# Altium PCB USBPowerv1.0.PcbDoc
Units mm, origin at the board's own origin, x right, y up, seen from the top; angles counter-clockwise.
Board outline 26.67 x 61.59 mm, 2 copper layers (Top Layer, Bottom Layer); 29 components, 14 nets, 75 pads, 72 vias.
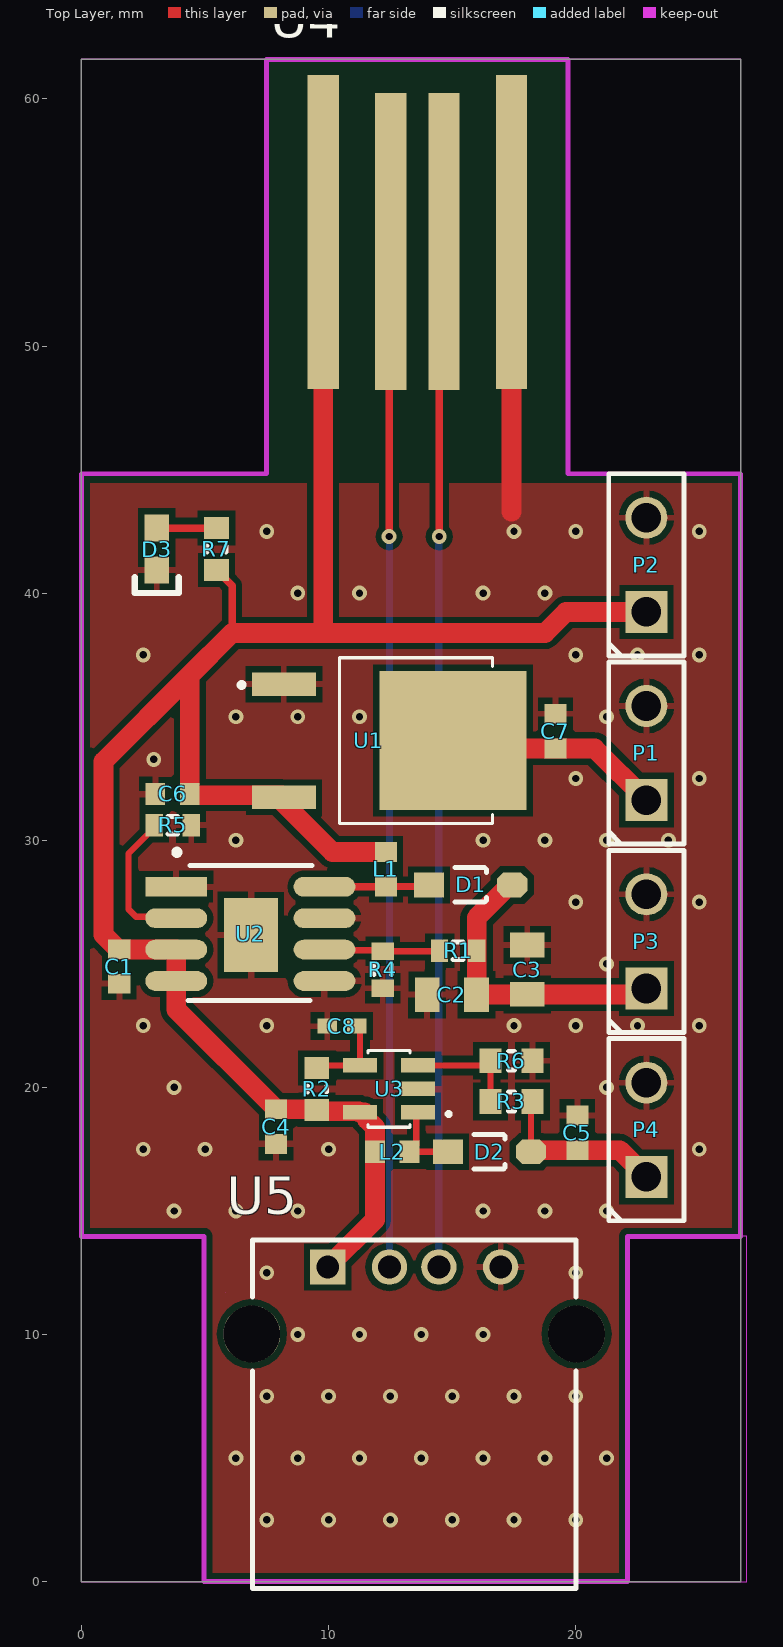
[diagram p0: Top Layer view]
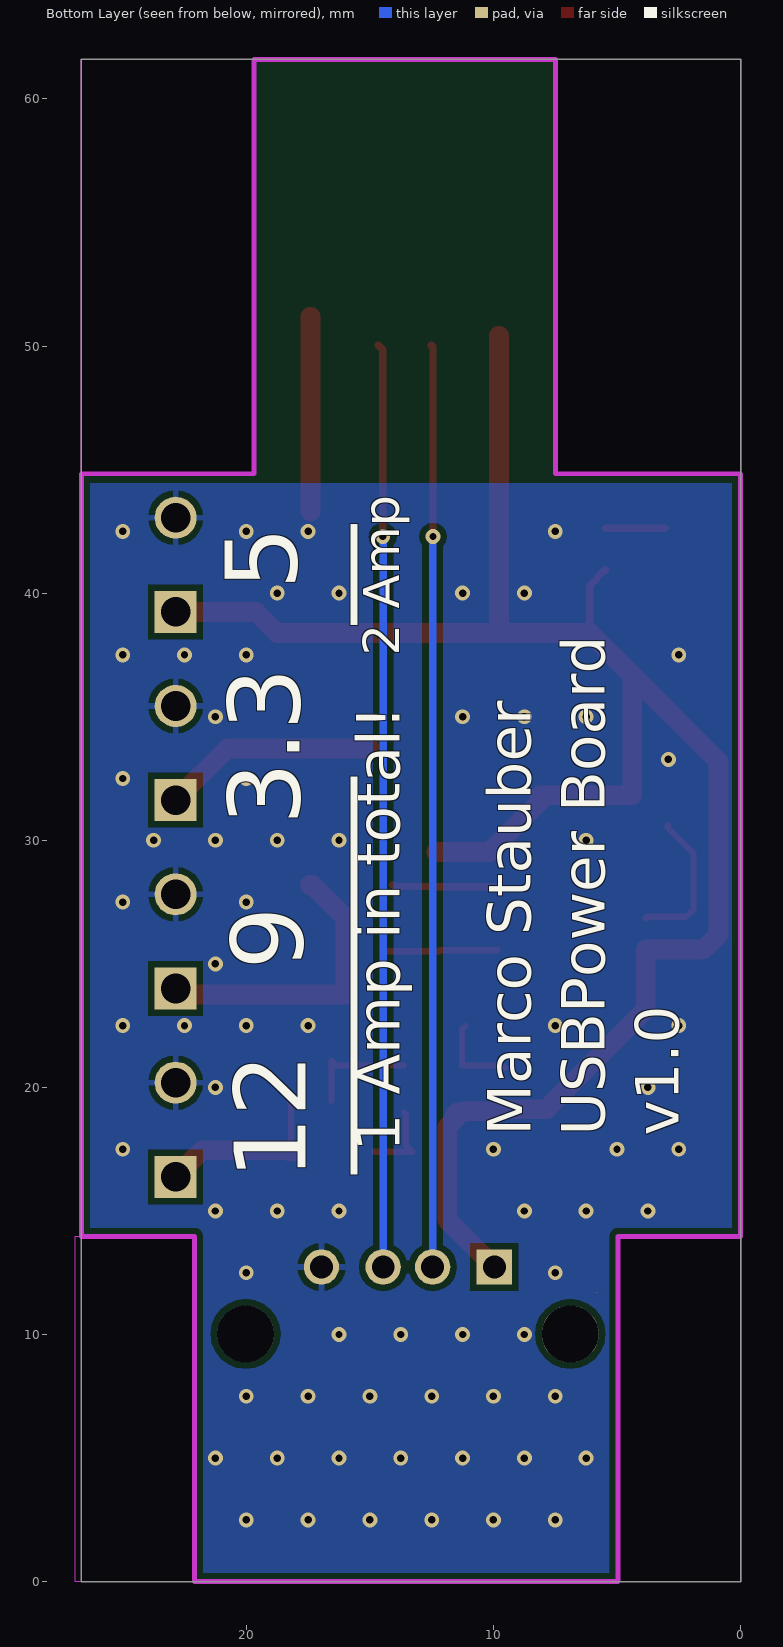
[diagram p1: Bottom Layer view, seen from below]
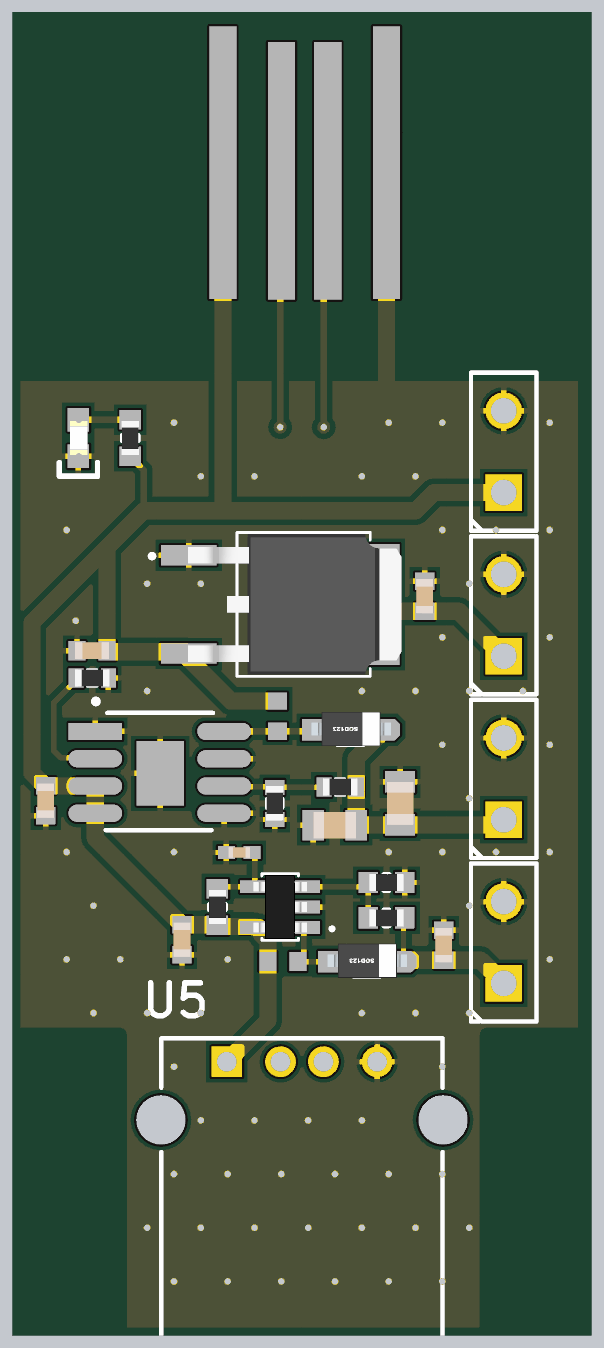
[diagram p2: 3D render of the assembled board from above, using the file's embedded part models]

## Layer stack, top to bottom
Top Solder: solder mask 0.0102, Solder Resist, Dk 3.5
Top Layer: signal copper 0.0356
Dielectric 1: dielectric 0.32, FR-4, Dk 4.8
Bottom Layer: signal copper 0.0356
Bottom Solder: solder mask 0.0102, Solder Resist, Dk 3.5

## Board outline
0,0 26.67,0 26.67,61.595 0,61.595
cut-out: 0,0 4.953,0 4.953,13.97 0,13.97
cut-out: 19.685,44.831 26.67,44.831 26.67,61.595 19.685,61.595
cut-out: 0,44.831 7.493,44.831 7.493,61.595 0,61.595
cut-out: 22.098,0 26.924,0 26.924,13.97 22.098,13.97
cut-out: 5.842,11.684

## Design rules (kind name [scope] priority, off if disabled: settings)
Clearance [All] p1: gap=0.254 ignorepadtopadclearanceinfootprint=FALSE except(0: Arc-Hole Track-Hole SMDPad-Hole THPad-Hole Via-Hole Fill-Hole Poly-Hole Region-Hole Text-Hole)
PolygonConnect [All] p1: thpad.connectstyle=Relief thpad.reliefconductorwidth=0.254 thpad.reliefentries=4 thpad.polygonreliefangle="90 Angle" thpad.airgapwidth=0.254 smdpad.connectstyle=Relief smdpad.reliefconductorwidth=0.254 smdpad.reliefentries=4 smdpad.polygonreliefangle="90 Angle" smdpad.airgapwidth=0.254 via.connectstyle=Direct via.reliefconductorwidth=0.254 via.reliefentries=4 via.polygonreliefangle="90 Angle" via.airgapwidth=0.254
RoomDefinition USBPowerv1.0 [InComponentClass('USBPowerv1.0')] p1 off: confinementstyle=ConfineIn formatcopy=TRUE lockcomponents=FALSE outline 154.37,9.398 299.785,9.398 299.785,24.638 154.37,24.638
RoutingVias [All] p1: holewidth=6 width=8 viastyle="Through Hole" minholewidth=0.3 minwidth=0.6 maxholewidth=0.3 maxwidth=0.6
SolderMaskExpansion [All] p1: expansion=0.102
Width [All] p1: maxlimit=6 minlimit=0.254 preferedwidth=0.254
30 further rules are at their usual default settings.

## Classes and differential pairs
component class USBPowerv1.0: C1 C2 C3 C4 C5 C6 C7 C8 D2 D3 L1 L2 P1 P2 P3 R1 R2 R3 R4 R5 R6 R7 U1 U2 U3 U4 U5

## Components (designator, comment, footprint, x,y, rotation, side; value= is the part's Value field where it differs from the comment)
C1 "10uF" "CAP_0603i_1608m -L" 1.524,24.892 r90 top
C2 "22uF" "CAP_0805i_2012m -N" 14.986,23.749 r0 top
C3 "22uF" "CAP_0805i_2012m -N" 18.034,24.765 r270 top
C4 "10uF" "CAP_0603i_1608m -L" 7.874,18.415 r90 top
C5 "10uF" "CAP_0603i_1608m -L" 20.066,18.161 r270 top
C6 "10uF" "CAP_0603i_1608m -L" 3.683,31.877 r0 top
C7 "10uF" "CAP_0603i_1608m -L" 19.177,34.417 r270 top
C8 "1nF" "CAP_0402i_1005m -N" 10.541,22.479 r0 top
D1 "Diode  Schottky" SOD123 15.748,28.194 r180 top
D2 "Diode  Schottky" SOD123 16.51,17.399 r180 top
D3 "Grün" *0603 3.048,41.783 r90 top
L1 "4.7uH" "IND_0603i_1608m -L" 12.319,28.829 r270 top
L2 "4.7uH" "IND_0603i_1608m -L" 12.573,17.399 r0 top
P1 "Header 2" "3.81mm HDR1X2" 22.86,31.623 r90 top
P2 "Header 2" "3.81mm HDR1X2" 22.86,39.243 r90 top
P3 "Header 2" "3.81mm HDR1X2" 22.86,24.003 r90 top
P4 "Header 2" "3.81mm HDR1X2" 22.86,16.383 r90 top
R1 "180k" "RES_0603_1608m -L" 15.24,25.527 r0 top
R2 "1M" "RES_0603i_1608m -N" 9.525,19.939 r90 top
R3 "470k" "RES_0603i_1608m -N" 17.399,19.431 r180 top
R4 "13k" "RES_0603_1608m -L" 12.192,24.765 r90 top
R5 "160k" "RES_0603_1608m -L" 3.695,30.607 r180 top
R6 "51k" "RES_0603i_1608m -N" 17.399,21.082 r0 top
R7 "1k" "RES_0603i_1608m -N" 5.461,41.783 r270 top
U1 "UZ1084G-3.3V-TN3-R" TO-252-2 12.446,34.036 r270 top
U2 "FP6298XR-G1" SOP8 3.835,28.118 r0 top
U3 "TS1935BCX5" *SOT95P285X145-5N 12.446,19.939 r180 top
U4 "USB A 2.0" "USB A 2.0 Male" 13.589,54.229 r0 top
U5 "USB A 2.0" OST_USB-A1HSW6 13.462,6.223 r0 top

## Footprints (in the part's own frame and the unit in brackets; to place one, negate y for a bottom-side part, rotate by r counter-clockwise, add the part's x,y. Pads: shape width x height; smd on the part's side, far side on the other; paste and mask are expansions set on the pad)
"3.81mm HDR1X2" [mm] "Holes, 3,81mm pitch, 1 Row, 2 Pin"
  rect 1.7x1.7 hole 1.2: 1(0,0)
  round 1.7 hole 1.2: 2(3.81,0)
  silkscreen extent -1.78,-1.52 5.59,1.52
*0603 [mm]
  rect 1.1x1 smd: 1(-0.85,0) 2(0.85,0)
  silkscreen extent -1.78,-0.89 -1.14,0.89, body extent -0.8,-0.42 0.8,0.38, height 0.8
*SOT95P285X145-5N [mm]
  rect 1.37x0.59 smd: 1(-1.175,0.95) 2(-1.175,0) 3(-1.175,-0.95) 4(1.175,-0.95) 5(1.175,0.95)
  silkscreen extent -2.47,-1.55 0.85,1.55, body extent -1.25,-1.5 1.25,1.5, height 1.1
"CAP_0402i_1005m -N" [mm] "Chip Capacitor, Body 1.0x0.5mm, IPC Medium Density"
  rect 0.8x0.6 smd: 1(-0.6,0) 2(0.6,0)
  body extent -0.5,-0.25 0.5,0.25, height 0.5
"CAP_0603i_1608m -L" [mm] "Chip Capacitor, Body 1.6x0.8mm, IPC High Density"
  rect 0.8x0.9 smd: 1(-0.7,0) 2(0.7,0)
  body extent -0.8,-0.4 0.8,0.4, height 0.8
"CAP_0805i_2012m -N" [mm] "Chip Capacitor, Body 2.0x1.3mm, IPC Medium Density"
  rect 1x1.4 smd: 1(-1,0) 2(1,0)
  body extent -1,-0.62 1,0.63, height 0.6
"IND_0603i_1608m -L" [mm] "Chip Inductor, Body 1.6x0.8mm, IPC High Density"
  rect 0.8x0.9 smd: 1(-0.7,0) 2(0.7,0)
  body extent -0.87,-0.48 0.87,0.48, height 0.71
OST_USB-A1HSW6 [mm]
  rect 1.428x1.428 hole 0.92: 1(-3.5,6.51)
  round 1.428 hole 0.92: 2(-1,6.51) 3(1,6.51) 4(3.5,6.51)
  round 2.3 hole 2.3 unplated: ""(-6.57,3.8) ""(6.57,3.8)
  silkscreen extent -6.55,-6.5 6.55,7.6
"RES_0603_1608m -L" [mm] "Chip Resistor, Body 1.6x0.8mm, IPC High Density"
  rect 0.7x0.9 smd: 1(-0.75,0) 2(0.75,0)
  silkscreen extent -0.2,-0.35 0.2,0.35, body extent -0.8,-0.4 0.8,0.4, height 0.4
"RES_0603i_1608m -N" [mm] "Chip Resistor, Body 1.6x0.8mm, IPC Medium Density"
  rect 0.9x1 smd: 1(-0.85,0) 2(0.85,0)
  silkscreen extent -0.13,-0.38 0.13,0.38, body extent -0.8,-0.4 0.8,0.4, height 0.4
SOD123 [mm] "SOD123  2-Leads, Body, IPC Medium Density"
  rect 1.22x1 smd: 1(1.681,0)
  oct 1.22x1 smd: 2(-1.681,0)
  silkscreen extent -0.64,-0.7 0.64,0.7, body extent -1.85,-0.84 1.85,0.76, height 1.27
SOP8 [mm]
  rect 2.5x0.8 smd: 1(0,0)
  oval 2.5x0.8 smd: 2(0,-1.27) 3(0,-2.54) 4(0,-3.81) 5(6,-3.81) 6(6,-2.54) 7(6,-1.27) 8(6,0)
  rect 2.2x3 smd: 5(3.023,-1.956)
  silkscreen extent -0.07,-4.6 5.49,1.5
TO-252-2 [mm]
  rect 0.95x2.59 smd: 1(-2.286,-4.26) 3(2.286,-4.26)
  rect 5.63x5.94 smd: 2(0,2.59)
  silkscreen extent -3.35,-6.07 3.35,4.19, body extent -3.27,-4.29 3.27,5.65, height 2.34
"USB A 2.0 Male" [mil]
  rect 50x500 smd: 1(-150,15) 4(150,15)
  rect 50x472.44 smd: 2(-42.5,0) 3(42.5,0)

## Part data
C1 C2 C3 C4 C5 C6 C7 C8: library part Cap, "capacitor"
D1 D2: "Schottky Diode"
D3: library part LTST-C191KGKT, "LED; SMD; 0603; grün; 35mcd; 1.6x0.8x0.55mm; 130Â°; 2Ã·2.V; 20mA", Package="0603 Lite-On", Digi-Key_Part_Number=160-1446-1-ND, Digi-Key_Purchase_URL=https://www.digikey.ch/product-detail/de/lite-on-inc/LTST-C191KGKT/160-1446-1-ND/386834, MF="Lite-On Inc.", MP=LTST-C191KGKT, SnapEDA_Link=https://www.snapeda.com/parts/LTST-C191KFKT/Lite-On%20Inc./view-part/?ref=snap
L1 L2: library part Inductor, "Inductor"
P1 P2 P3 P4: "Header, 2-Pin"
R1 R4 R5 R7: library part Res, "Resistor"
R2 R3 R6: library part Res
U1: "LINEAR VOLTAGE REGULATORS TO-252-2(DPAK) ROHS", Package="TO-252-2 Diodes Inc.", Availability=Unavailable, MF="Diodes Inc.", MP=AZ1117D-3.3TRE1, Price=None, SnapEDA_Link=https://www.snapeda.com/parts/AZ1117D-3.3TRE1/Diodes%20Inc./view-part/856390/?ref=snap
U3: "TS1935BCX5 Boost-Schaltregler Adj 1,9A 2,6-5,5Vi SOT23-5"

## Via types
v1: diameter 0.6, hole 0.3, Top Layer to Bottom Layer, tented both sides, 72 vias

## Nets (pads, with @x,y where several pads share a name; then routed paths per layer and width w, separated by ;. In a path a pad name is that pad's centre, name@x,y a point inside that pad or via, vN(x,y) a via of type N, cw(c..) or ccw(c..) an arc to the next point about the centre after c; other vN are vias at no path point)
+3.3: C7.2 P1.1 U1.2 | length 8.7
  Top Layer w0.8: U1.2@15.036,33.782 15.101,33.717 C7.2 20.766,33.717 P1.1
+5: C1.2 C4.2 C6.2 L1.1 L2.1 P2.1 R2.1 R7.2 U1.3 U2.3 U2.4 U3.5 U4.1 U5.1 | length 82.1
  Top Layer w0.3: R7.2 5.511,40.933 5.811,40.633 5.811,40.583 6.096,40.298 6.096,38.393
  Top Layer w0.4: 14.605,38.393 14.62,38.408
  Top Layer w0.8: R2.1 9.499,19.115 C4.2 7.824,19.115 7.824,19.165 3.835,23.154 U2.4 U2.3 1.588,25.578 1.574,25.592 C1.2 1.474,25.592 0.889,26.177 0.889,33.186 4.383,36.68 ; U4.1@9.779,50.419 9.779,38.393 ; R2.1@9.891,19.039 11.221,19.039 U3.5 11.451,18.989 11.556,18.884 11.556,18.704 11.873,18.387 L2.1 11.873,14.644 U5.1 ; L1.1 10.153,29.529 8.111,31.571 8.111,31.825 8.109,31.827 4.383,31.827 C6.2 4.383,36.68 ; P2.1 19.607,39.243 18.757,38.393 14.605,38.393 9.779,38.393 ; 4.383,36.68 6.096,38.393 9.779,38.393
+9: C2.2 C3.2 D1.2 P3.1 R1.2 | length 12.1
  Top Layer w0.8: C2.2 C2.2@15.99,23.753 ; D1.2 17.319,28.194 15.99,26.865 R1.2 C2.2@15.99,23.753 ; P3.1 22.622,23.765 C3.2 18.026,23.757 15.994,23.757 C2.2@15.99,23.753
+12: C5.2 D2.2 P4.1 R3.1 | length 7.2
  Top Layer w0.254: D2.2 18.191,19.373 R3.1
  Top Layer w0.8: D2.2 18.253,17.461 C5.2 21.782,17.461 P4.1
GND: C1.1 C2.1 C3.1 C4.1 C5.1 C6.1 C7.1 C8.1 D3.1 P1.2 P2.2 P3.2 P4.2 R4.1 R5.1 R6.2 U1.1 U2.1 U2.5 U2.7 U3.2 U4.4 U5.4 | length 7.9
  Top Layer w0.8: 17.399,43.307 U4.4@17.399,51.181
  other v1: 7.5,2.5 10,2.5 12.5,2.5 15,2.5 17.5,2.5 20,2.5 6.25,5 8.75,5 11.25,5 13.75,5 16.25,5 18.75,5 21.25,5 7.5,7.5 10,7.5 12.5,7.5 15,7.5 17.5,7.5 20,7.5 8.75,10 11.25,10 13.75,10 16.25,10 7.5,12.5 20,12.5 3.75,15 6.25,15 8.75,15 16.25,15 18.75,15 21.25,15 2.5,17.5 5,17.5 10,17.5 25,17.5 3.75,20 21.25,20 2.5,22.5 7.5,22.5 17.5,22.5 20,22.5 22.5,22.5 25,22.5 21.25,25 20,27.5 25,27.5 6.25,30 16.25,30 18.75,30 21.25,30 23.75,30 20,32.5 25,32.5 2.921,33.274 6.25,35 8.75,35 11.25,35 21.25,35 2.5,37.5 20,37.5 22.5,37.5 25,37.5 8.75,40 11.25,40 16.25,40 18.75,40 7.5,42.5 17.5,42.5 20,42.5 25,42.5
NetC8_2: C8.2 R2.2 U3.4 | length 3.4
  Top Layer w0.254: R2.2 9.625,20.889 U3.4 11.271,22.349 C8.2
NetD1_1: D1.1 L1.2 U2.8 | length 4.3
  Top Layer w0.3: U2.8 9.841,28.123 12.313,28.123 L1.2 14.002,28.129 D1.1
NetD2_1: D2.1 L2.2 U3.1 | length 3.3
  Top Layer w0.254: U3.1 13.546,18.914 13.546,17.672 L2.2 D2.1
NetD3_2: D3.2 R7.1 | length 2.4
  Top Layer w0.3: D3.2 R7.1
NetR1_1: R1.1 R4.2 U2.6 | length 4.7
  Top Layer w0.254: U2.6 9.867,25.546 12.161,25.546 R4.2 14.478,25.515 R1.1
NetR3_2: R3.2 R6.1 U3.3 | length 4.7
  Top Layer w0.254: U3.3 16.356,20.889 R6.1 R3.2
NetR5_2: R5.2 U2.2 | length 5.9
  Top Layer w0.254: R5.2 2.945,30.507 1.905,29.467 1.905,27.2 2.204,26.9 3.783,26.9 U2.2
NetU4_2: U4.2 U5.2 | length 37.3
  Top Layer w0.3: v1(12.446,42.291) 12.446,49.974 U4.2@12.509,50.038
  Bottom Layer w0.3: v1(12.446,42.291) 12.462,42.275 U5.2
NetU4_3: U4.3 U5.3 | length 37.4
  Top Layer w0.3: v1(14.478,42.291) 14.478,49.847 U4.3@14.668,50.038
  Bottom Layer w0.3: U5.3 14.462,42.275 v1(14.478,42.291)
pads on no net: U5.

## Polygon pours and split planes (outlines as drawn)
GND on Bottom Layer "BOT_GND" (solid, remove dead copper, pour order 6): 0,44.45 26.67,44.45 26.67,0.254 26.67,0 0,0
GND on Top Layer "TOP_GND" (solid, remove dead copper, pour order 8): 0,44.45 26.67,44.45 26.67,0 0,0

## Keep-outs
Keep-Out Layer:
  lines w0.2: 0,13.97 0,44.831 7.493,44.831 7.493,61.595 19.685,61.595 19.685,44.831 26.67,44.831 26.67,13.97 22.098,13.97 22.098,0 4.953,0 4.953,13.97 0,13.97

## Silkscreen, mask and mechanical layers (free items; w line width, h text height)
Bottom Overlay:
  text "5" at 17.018,40.132 h5 r270
  text "__" at 15.494,38.735 h5 r270
  text "2 Amp" at 13.335,37.465 h2.5 r270
  text "3.3" at 16.891,30.607 h5 r270
  text "9" at 16.764,24.765 h5 r270
  text "Marco Stauber / USBPower Board / v1.0" at 1.905,18.034 h3 r270
  text "1 Amp in total!" at 13.208,17.399 h3 r270
  text "________" at 15.494,16.51 h5 r270
  text "12" at 16.637,16.256 h5 r270
Bottom Solder:
  drawing of 8 lines, arcs and shapes, not listed
Mechanical 1:
  lines w0.2: 0,13.97 0,44.831 7.493,44.831 7.493,61.595 19.685,61.595 19.685,44.831 26.67,44.831 26.67,13.97 22.098,13.97 22.098,0 4.953,0 4.953,13.97 0,13.97